# Altium PCB PCB_draft_00.PcbDoc (part 1 of 2)
Units mil, origin at the board's own origin, x right, y up, seen from the top; angles counter-clockwise.
Board outline 3461 x 3199 mil, 2 copper layers (Top Layer, Bottom Layer); 133 components, 93 nets, 389 pads, 200 vias.
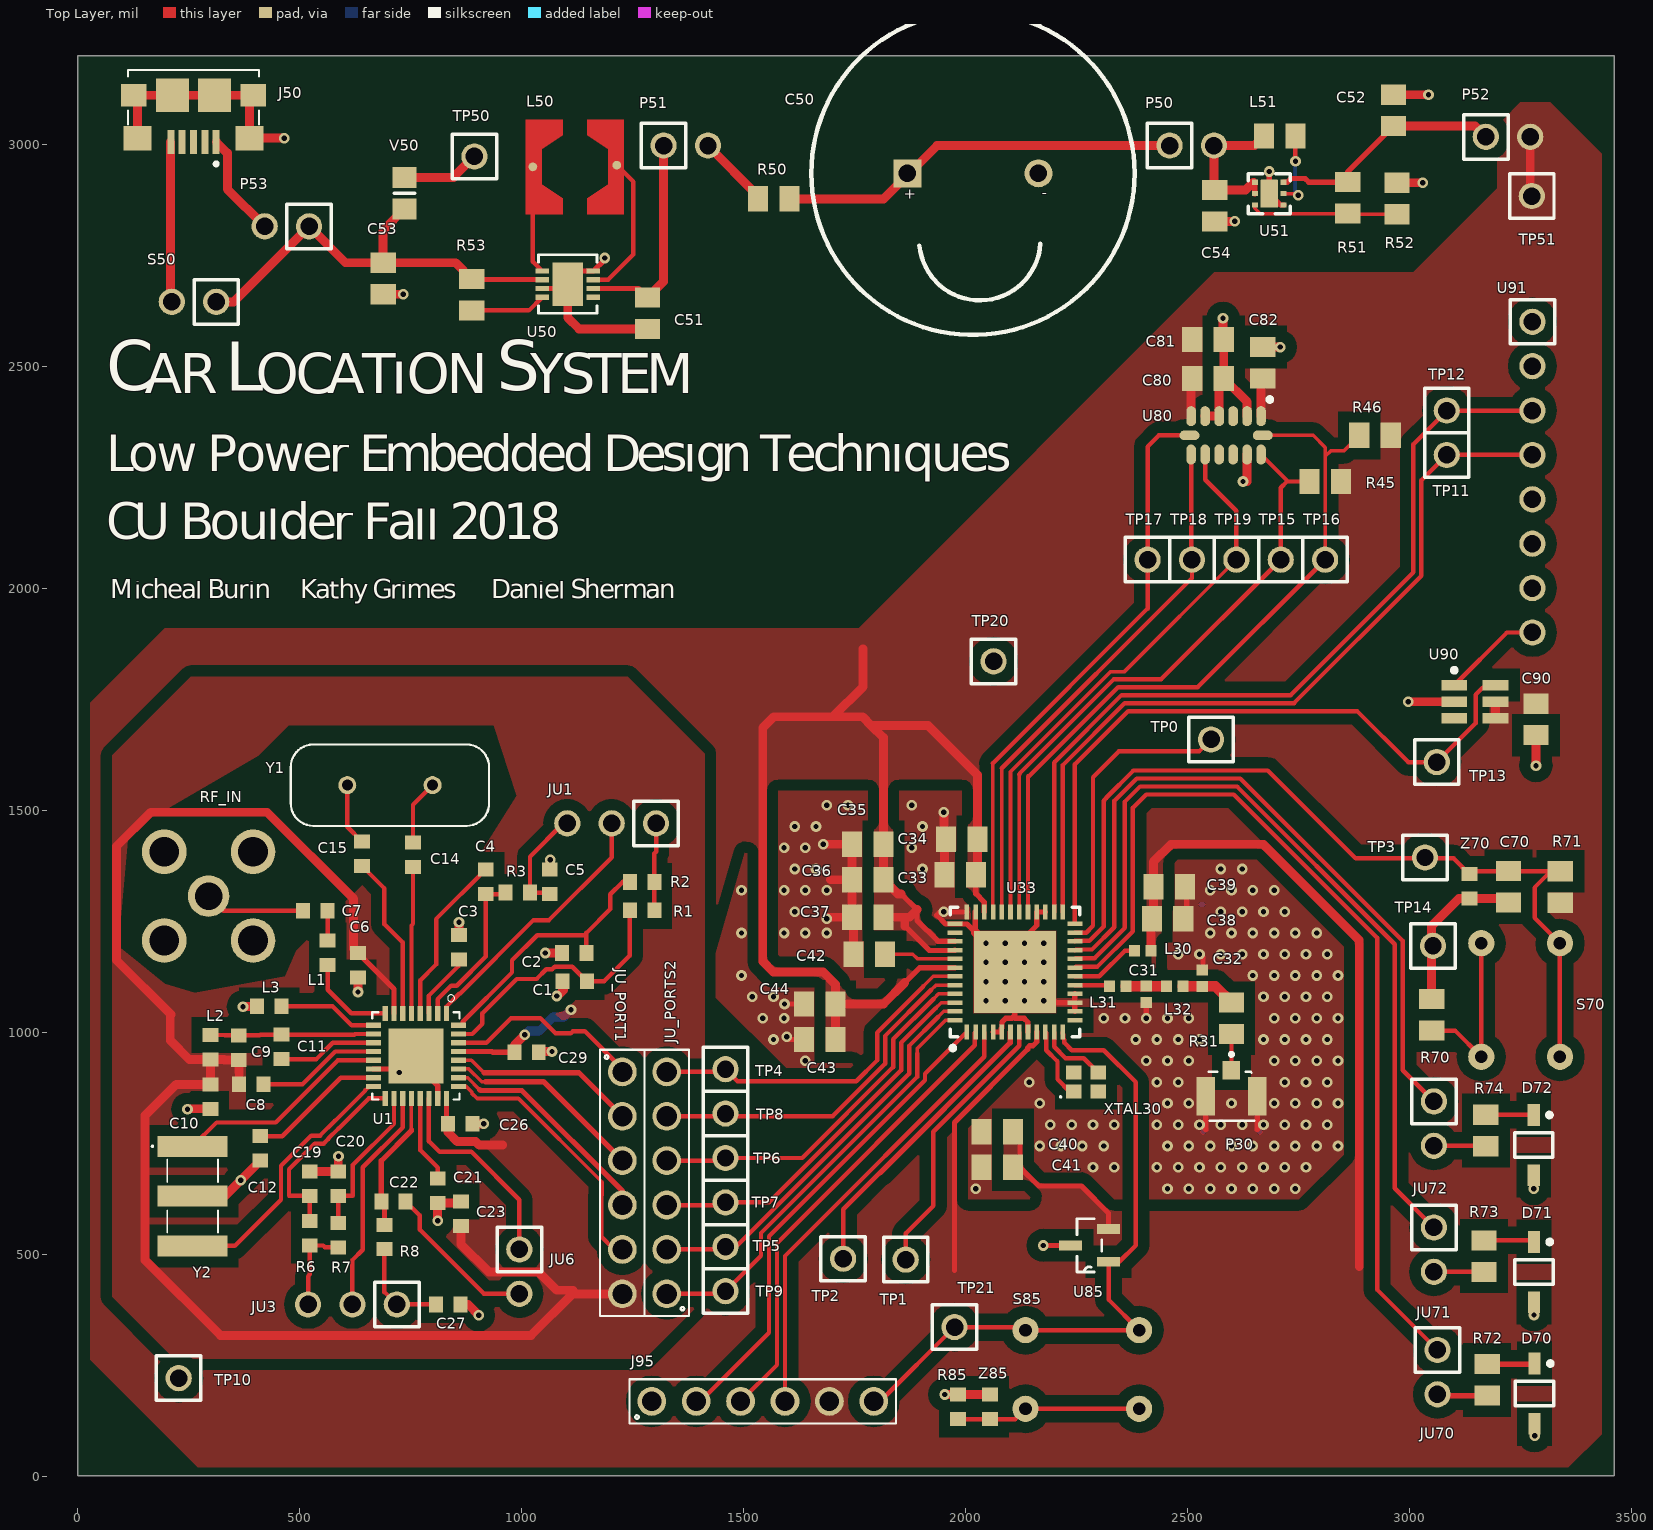
[diagram p0: Top Layer view]
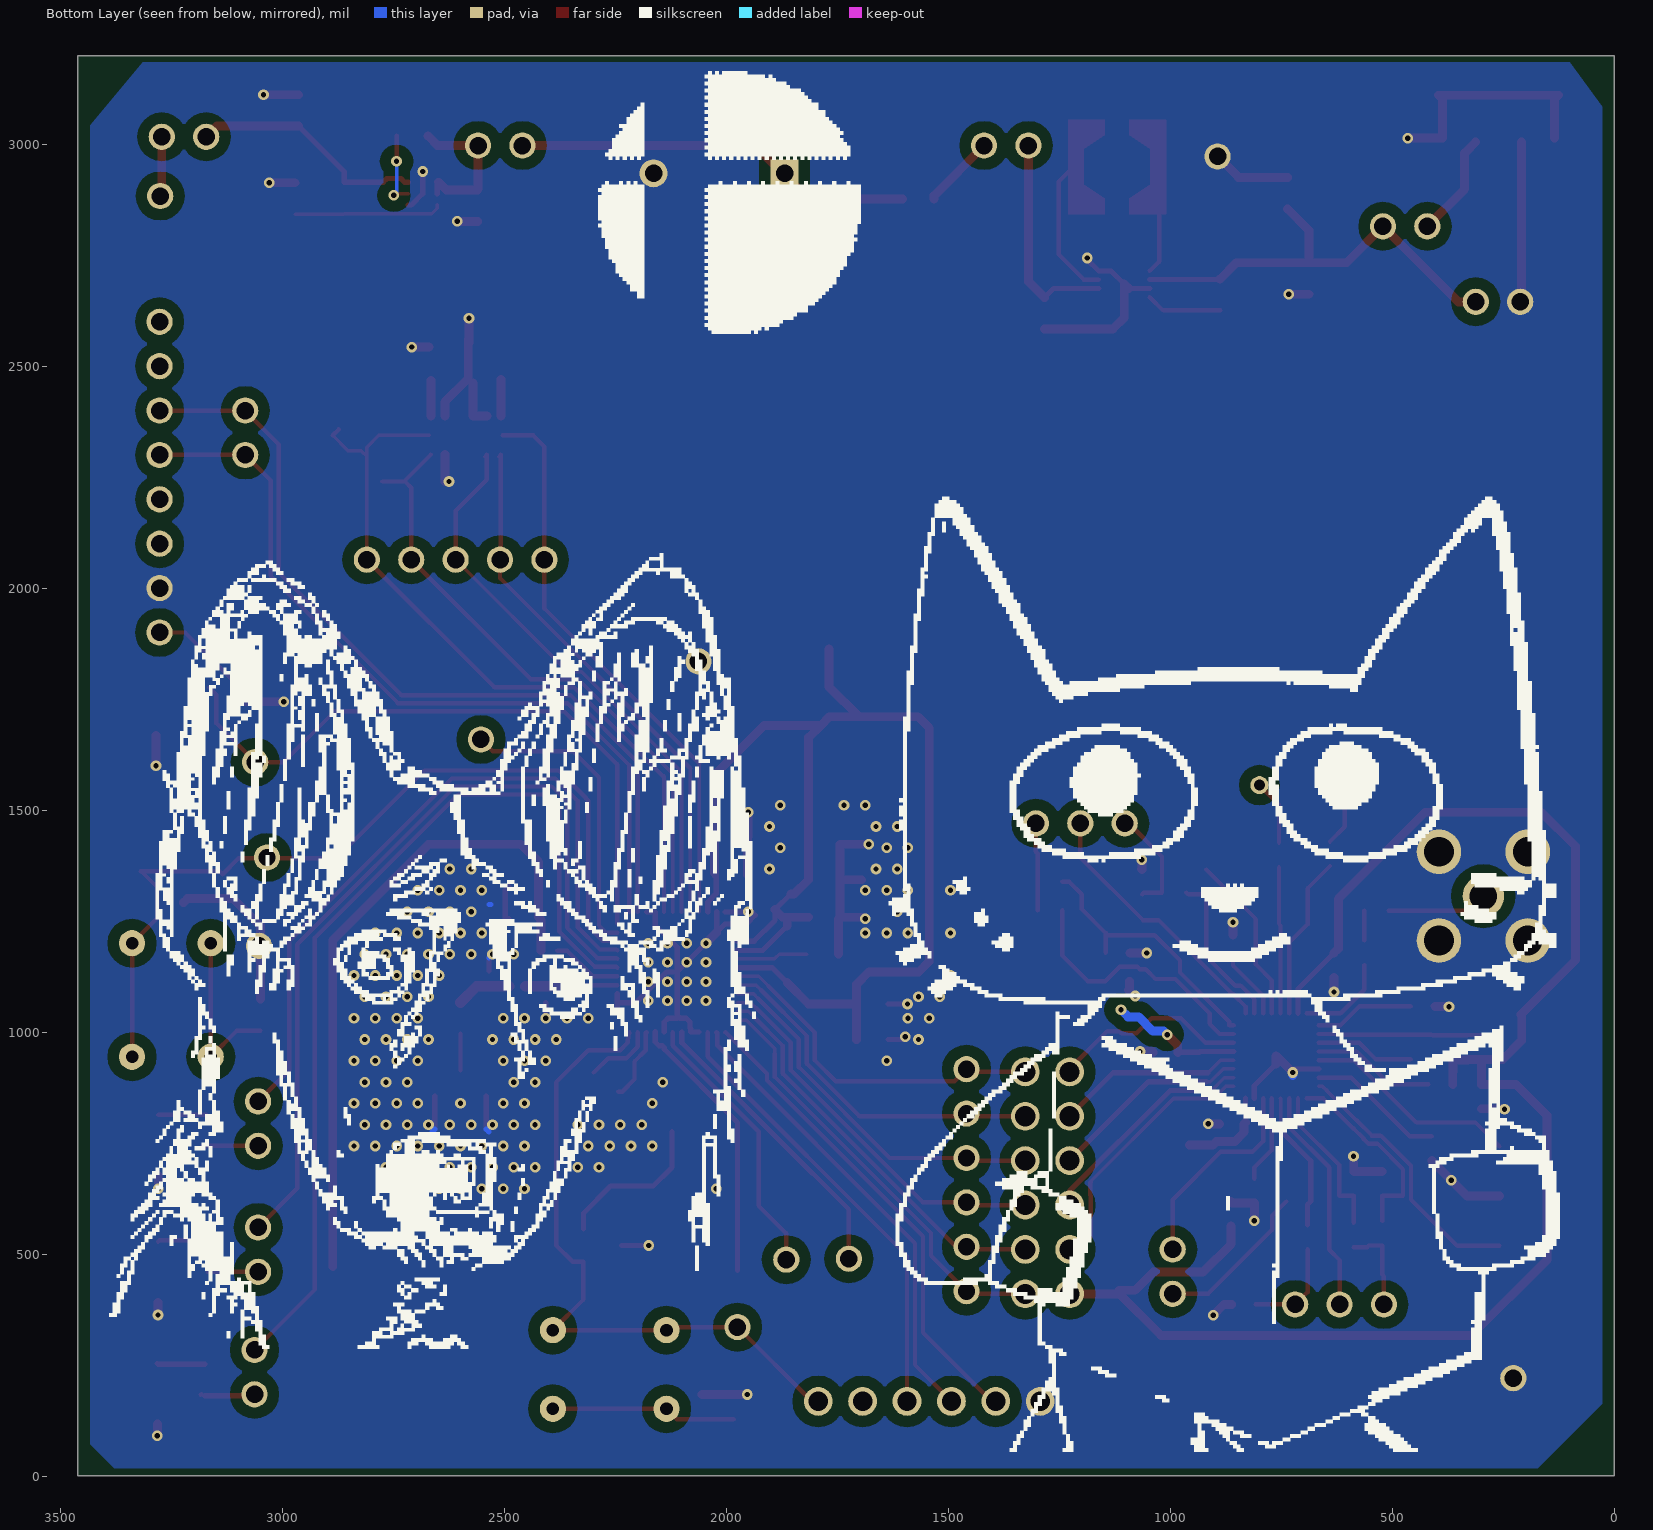
[diagram p1: Bottom Layer view, seen from below]

## Layer stack, top to bottom
Top Solder: solder mask 0.4, Solder Resist, Dk 3.5
Top Layer: signal copper 1.4
Dielectric 1: dielectric 12.6, FR-4, Dk 4.8
Bottom Layer: signal copper 1.4
Bottom Solder: solder mask 0.4, Solder Resist, Dk 3.5

## Board outline
0,1 3461,1 3461,3200 0,3200

## Design rules (kind name [scope] priority, off if disabled: settings)
Clearance [All] p1: gap=10 ignorepadtopadclearanceinfootprint=FALSE except(0: Arc-Hole Track-Hole SMDPad-Hole THPad-Hole Via-Hole Fill-Hole Poly-Hole Region-Hole Text-Hole; 6: Arc-SMDPad Track-SMDPad SMDPad-SMDPad; 8: Track-Track; 20: Arc-Via Track-Via THPad-Via Via-Via; 25: Arc-Poly Track-Poly SMDPad-Poly THPad-Poly Via-Poly Fill-Poly Poly-Poly)
Height [not InComponent('C50')] p1: minheight=0 maxheight=1000 prefheight=500
PolygonConnect [All] p1: connectstyle=Direct reliefconductorwidth=10 reliefentries=4 polygonreliefangle="90 Angle" airgapwidth=10
RoomDefinition U_GPS [InComponentClass('U_GPS')] p1: confinementstyle=ConfineIn formatcopy=TRUE lockcomponents=FALSE outline 3381.3,2689 3029,2689 3029,1601 3381.3,1601
RoomDefinition U_RFRX [InComponentClass('U_RFRX')] p2: confinementstyle=ConfineIn formatcopy=TRUE lockcomponents=FALSE outline 66,131 1386,131 1386,1747 66,1747
RoomDefinition U_Reset [InComponentClass('U_Reset')] p3: confinementstyle=ConfineIn formatcopy=TRUE lockcomponents=FALSE outline 1879,88 2431,88 2431,591 1879,591
RoomDefinition U_MCU [InComponentClass('U_MCU')] p4: confinementstyle=ConfineIn formatcopy=TRUE lockcomponents=FALSE outline 1392,456 2919,456 2919,1792 1392,1792
RoomDefinition U_IO [InComponentClass('U_IO')] p5: confinementstyle=ConfineIn formatcopy=TRUE lockcomponents=FALSE outline 2959,54.46 3394,54.46 3394,1496 2959,1496
RoomDefinition U_ESS [InComponentClass('U_ESS')] p6: confinementstyle=ConfineIn formatcopy=TRUE lockcomponents=FALSE outline 50.09,2539.32 3357.64,2539.32 3357.64,3313.51 50.09,3313.51
RoomDefinition U_Accelerometer [InComponentClass('U_Accelerometer')] p7: confinementstyle=ConfineIn formatcopy=TRUE lockcomponents=FALSE outline 2379.13,2236.5 2845.5,2236.5 2845.5,2696 2379.13,2696
RoutingLayers RoutingLayers_GND_VCC [InNet('GND')  or InNet('VCC_3.3')] p1 off: top layer_v5=FALSE bottom layer_v5=FALSE
RoutingLayers [All] p2: top layer_v5=TRUE bottom layer_v5=TRUE
RoutingVias [All] p1: holewidth=12 width=24 viastyle="Through Hole" minholewidth=12 minwidth=24 maxholewidth=14 maxwidth=28
SolderMaskExpansion [All] p1: expansion=4
Width Width_power [(InNet('VCC_3.3') OR InNet('VCC_50') OR InNet('VCC_51_1') OR InNet('VCC_51_2') OR InNet('VCC_52') OR InNet('VCC_CAP') OR InNet('VCC_USB') OR InNet('VCC_RF') OR InNet('VCC_SOLAR') OR InNet('GND'))] p1: maxlimit=20 minlimit=12 preferedwidth=20
Width [All] p2: maxlimit=12 minlimit=8 preferedwidth=10
28 further rules are at their usual default settings.

## Classes and differential pairs
component class Top: R45 R46 TP0 TP1 TP2 TP3 TP4 TP5 TP6 TP7 TP8 TP9 TP10 TP11 TP12 TP13 TP14 TP15 TP16 TP17 TP18 TP19 TP20 TP21
component class U_Accelerometer: C80 C81 C82 U80
component class U_Antenna: A30 C31 C32 L31 L32 P30 R31
component class U_ESS: C50 C51 C52 C53 C54 J50 L50 L51 P50 P51 P52 P53 R50 R51 R52 R53 S50 TP50 TP51 U50 U51 V50
component class U_GPS: C90 U90 U91
component class U_IO: C70 D70 D71 D72 JU70 JU71 JU72 R70 R71 R72 R73 R74 S70 Z70
component class U_MCU: C33 C34 C35 C36 C37 C38 C39 C40 C41 C42 C43 C44 L30 U33 XTAL30
component class U_Programmer: G95 J95
component class U_Reset: R85 S85 U85 Z85
component class U_RFRX: C1 C2 C3 C4 C5 C6 C7 C8 C9 C10 C11 C12 C14 C15 C19 C20 C21 C22 C23 C26 C27 C29 JU1 JU3 JU6 JU_PORT1 JU_PORTS2 L1 L2 L3 R1 R2 R3 R6 R7 R8 RF_IN U1 Y1 Y2

## Components (designator, comment, footprint, x,y, rotation, side; value= is the part's Value field where it differs from the comment)
C1 "Capacitor_unpolarized_0603" 0603_CHIP_FP 1119,1115 r0 top value=0.01µF
C2 "Capacitor_unpolarized_0603" 0603_CHIP_FP 1118.12,1179 r0 top value=0.01µF
C3 "Capacitor_unpolarized_0603" 0603_CHIP_FP 858.56,1191.44 r90 top value=150pF
C4 "Capacitor_unpolarized_0603" 0603_CHIP_FP 919,1339 r90 top value=330pF
C5 "Capacitor_unpolarized_0603" 0603_CHIP_FP 1063,1339 r270 top value=0.047µF
C6 "Capacitor_unpolarized_0603" 0603_CHIP_FP 631,1151.44 r270 top value=0.1µF
C7 "Capacitor_unpolarized_0603" 0603_CHIP_FP 535,1274.12 r180 top value=100pF
C8 "Capacitor_unpolarized_0603" 0603_CHIP_FP 391,883 r0 top value=100pF
C9 "Capacitor_unpolarized_0603" 0603_CHIP_FP 362.56,965.68 r90 top value=2.2pF
C10 "Capacitor_unpolarized_0603" 0603_CHIP_FP 298.56,855.44 r90 top value=220pF
C11 "Capacitor_unpolarized_0603" 0603_CHIP_FP 458.56,967.44 r270 top value=100pF
C12 "Capacitor_unpolarized_0603" 0603_CHIP_FP 410.56,738.56 r90 top value=1500pF
C14 "Capacitor_unpolarized_0603" 0603_CHIP_FP 755,1400 r90 top value=15pF
C15 "Capacitor_unpolarized_0603" 0603_CHIP_FP 640,1402.44 r90 top value=15pF
C19 "Capacitor_unpolarized_0603" 0603_CHIP_FP 522.56,659.44 r270 top value=0.01µF
C20 "Capacitor_unpolarized_0603" 0603_CHIP_FP 586.56,659.44 r270 top value=0.01µF
C21 "Capacitor_unpolarized_0603" 0603_CHIP_FP 810.56,643 r90 top value=56pF
C22 "Capacitor_unpolarized_0603" 0603_CHIP_FP 711,619 r0 top value=470pF
C23 "Capacitor_unpolarized_0603" 0603_CHIP_FP 863,591.44 r270 top value=0.01µF
C26 "Capacitor_unpolarized_0603" 0603_CHIP_FP 861,794 r180 top value=0.1µF
C27 "Capacitor_unpolarized_0603" 0603_CHIP_FP 834.56,387 r180 top value=0.047µF
C29 "Capacitor_unpolarized_0603" 0603_CHIP_FP 1010.69,955 r180 top value=0.01µF
C31 "Capacitor_unpolarized_0805" 0402_CHIP_FP 2407,1085.69 r90 top value=2.0pF
C32 "Capacitor_unpolarized_0805" 0402_CHIP_FP 2533,1122 r270 top value=1.0pF
C33 "Capacitor_unpolarized_0805" 0805_CHIP_FP 1987.57,1355.43 r180 top value=10nF
C34 "Capacitor_unpolarized_0805" 0805_CHIP_FP 1991,1435.43 r180 top value=10uF
C35 "Capacitor_unpolarized_0805" 0805_CHIP_FP 1779.57,1424 r0 top value=.1uF
C36 "Capacitor_unpolarized_0805" 0805_CHIP_FP 1779.57,1344 r0 top value=10uF
C37 "Capacitor_unpolarized_0805" 0805_CHIP_FP 1779.57,1259.43 r0 top value=.1uF
C38 "Capacitor_unpolarized_0805" 0805_CHIP_FP 2455,1256 r180 top value=10pF
C39 "Capacitor_unpolarized_0805" 0805_CHIP_FP 2458.43,1328 r180 top value=220nF
C40 "Capacitor_unpolarized_0805" 0805_CHIP_FP 2071,776 r0 top value=10pF
C41 "Capacitor_unpolarized_0805" 0805_CHIP_FP 2071,696 r0 top value=220nF
C42 "Capacitor_unpolarized_0805" 0805_CHIP_FP 1783,1176 r0 top value=1uF
C43 "Capacitor_unpolarized_0805" 0805_CHIP_FP 1671,984 r0 top value=.1uF
C44 "Capacitor_unpolarized_0805" 0805_CHIP_FP 1671,1064 r0 top value=1uF
C50 "Super Capacitor" TV1840-3R0606-R 1868.89,2935.51 r180 top value=60F
C51 "Capacitor_unpolarized_0805" 0805_CHIP_FP 1283.09,2620.18 r90 top value="10 uF"
C52 "Capacitor_unpolarized_0805" 0805_CHIP_FP 2964.09,3077.18 r270 top value="22 uF"
C53 "Capacitor_unpolarized_0805" 0805_CHIP_FP 687.57,2698.57 r90 top value="2.2 uF"
C54 "Capacitor_unpolarized_0805" 0805_CHIP_FP 2561.09,2862.74 r90 top value="10 uF"
C70 "Capacitor_unpolarized_0603" 0805_CHIP_FP 3223,1328 r90 top value=1nF
C80 "Capacitor Polarized" 0805_CHIP_FP 2546.06,2473.13 r0 top value=10uF
C81 "Capacitor_unpolarized_0805" 0805_CHIP_FP 2546.06,2561.13 r180 top value=.1uF
C82 "Capacitor_unpolarized_0805" 0805_CHIP_FP 2669.5,2508.57 r270 top value=.1uF
C90 "Capacitor_unpolarized_0603" 0805_CHIP_FP 3285,1705 r270 top value=1uF
D70 "LED Generic" LED_FP 3282,186 r270 top
D71 "LED Generic" LED_FP 3280.57,460 r270 top
D72 "LED Generic" LED_FP 3280,746 r270 top
J50 "2174507-2" J_SMD_2174507-2-5_7.8_5_2.71_2174507-2(Primary) 260.36,3111.32 r180 top
J95 "61300611121" 61300611121#1 1543,168.72 r0 top
JU1 "Header 3" HDR1X3 1302.56,1471 r180 top
JU3 "Header 3" HDR1X3 718.56,387 r180 top
JU6 "Header 2" HDR1X2 994.56,511 r270 top
JU70 "Header 2" HDR1X2 3063,284.57 r270 top
JU71 "Header 2" HDR1X2 3055,560.57 r270 top
JU72 "Header 2" HDR1X2 3055,844.57 r270 top
JU_PORT1 "61300611121" 61300611121#2 1226.56,661 r270 top
JU_PORTS2 "61300611121" 61300611121#2 1326.56,661 r90 top
L1 "Inductor" 0603_CHIP_FP 562.56,1179.44 r270 top value=100nH
L2 "Inductor" 0603_CHIP_FP 298.56,966.56 r270 top value=30nH
L3 "Inductor" 0603_CHIP_FP 431,1059 r0 top value=15nH
L30 "Inductor" 0402_CHIP_FP 2399,1184 r180 top value=22uH
L31 "Inductor" 0402_CHIP_FP 2343,1104 r0 top value=1.8nH
L32 "Inductor" 0402_CHIP_FP 2471,1104 r0 top value=3.0nH
L50 "Inductor_0805" 1919 1119.57,2950 r0 top value="15 uH"
L51 "Inductor_0805" 0805_CHIP_FP 2707.66,3019.74 r0 top value="2.2 uH"
P30 "uFL" MOLEX_1661 2599,856 r180 top
P50 "Header 2H" HDR1X2 2459.57,2998 r0 top
P51 "Header 2H" HDR1X2 1319.57,2998 r0 top
P52 "Header 2H" HDR1X2 3172.09,3017.74 r0 top
P53 "Header 2H" HDR1X2 520.79,2816.05 r180 top
R1 "Resistor" 0603_CHIP_FP 1271,1275 r0 top value=100K?
R2 "Resistor" 0603_CHIP_FP 1271,1339 r0 top value=100K?
R3 "Resistor" 0603_CHIP_FP 991,1315 r0 top value=25K?
R6 "Resistor" 0603_CHIP_FP 522.56,547.44 r90 top value=100K?
R7 "Resistor" 0603_CHIP_FP 586.56,543.44 r90 top value=100K?
R8 "Resistor" 0603_CHIP_FP 690.56,539 r90 top value=25K?
R31 "Resistor_0805" 0805_CHIP_FP 2599,1032 r90 top value=0
R45 "Resistor_0805" 0805_CHIP_FP 2810.34,2241.16 r0 top value=4.7k
R46 "Resistor_0805" 0805_CHIP_FP 2922.34,2345.16 r0 top value=4.7k
R50 "Resistor_0805" 0805_CHIP_FP 1567.57,2878 r0 top value="33 Ohm"
R51 "Resistor_0805" 0805_CHIP_FP 2860.84,2880.21 r90 top value="909 KOhms"
R52 "Resistor_0805" 0805_CHIP_FP 2971.84,2878.78 r270 top value="604 KOhms"
R53 "Resistor_0805" 0805_CHIP_FP 887.57,2662 r90 top value="1 MOhm"
R70 "Resistor_0805" 0805_CHIP_FP 3050,1039.57 r270 top value=100
R71 "Resistor_0805" 0805_CHIP_FP 3340,1327.57 r270 top value="1 MOhm"
R72 "Resistor_0805" 0805_CHIP_FP 3175,217 r270 top value=3.2kOhm
R73 "Resistor_0805" 0805_CHIP_FP 3168,496 r270 top value=3.2kOhm
R74 "Resistor_0805" 0805_CHIP_FP 3172,779 r270 top value=3.2kOhm
R85 "Resistor" 0603_CHIP_FP 1983,156.44 r270 top value=0
RF_IN "142-0701-201" 142-0701-201 294.56,1307 r0 top
S50 "Solar Cell" HDR1X2 311.57,2646 r180 top
S70 "Switch" Pushbutton 3161.84,1200.9 r270 top
S85 "Switch" Pushbutton 2390.91,329.17 r180 top
TP0 "Testpoint" HDR1X1 2553,1660 r0 top
TP1 "Testpoint" HDR1X1 1865,488 r0 top
TP2 "Testpoint" HDR1X1 1724,490 r0 top
TP3 "Testpoint" HDR1X1 3035,1394 r180 top
TP4 "Testpoint" HDR1X1 1459,917 r180 top
TP5 "Testpoint" HDR1X1 1459,517 r90 top
TP6 "Testpoint" HDR1X1 1459,717 r90 top
TP7 "Testpoint" HDR1X1 1459,617 r90 top
TP8 "Testpoint" HDR1X1 1459,817 r90 top
TP9 "Testpoint" HDR1X1 1459,417 r90 top
TP10 "Testpoint" HDR1X1 227,221 r180 top
TP11 "Testpoint" HDR1X1 3084,2301 r90 top
TP12 "Testpoint" HDR1X1 3084,2401 r90 top
TP13 "Testpoint" HDR1X1 3061.59,1609 r90 top
TP14 "Testpoint" HDR1X1 3053,1195 r180 top
TP15 "Testpoint" HDR1X1 2710,2065 r90 top
TP16 "Testpoint" HDR1X1 2810,2065 r90 top
TP17 "Testpoint" HDR1X1 2410,2065 r180 top
TP18 "Testpoint" HDR1X1 2510,2065 r180 top
TP19 "Testpoint" HDR1X1 2610,2065 r180 top
TP20 "Testpoint" HDR1X1 2063,1836 r180 top
TP21 "Testpoint" HDR1X1 1975,336 r180 top
TP50 "Testpoint" HDR1X1 893.24,2973.53 r90 top
TP51 "Testpoint" HDR1X1 3275.64,2884.31 r90 top
U1 "MAX1471" QFN50P500X500X80-33N 761.35,947.13 r270 top
U33 "EFR32BG1B232F256GM48-C0" QFN127P600-8N 2651.94,1676.94 r90 top
U50 "LTC3531EDD-3PBF" DFN-8_DD 1103.57,2686 r0 top
U51 "ADP1607ACPZN-R7" ADP1607 2684.09,2889.74 r90 top
U80 "MOTION/POSITION-ADXL345BCCZ-RL(14P-5.0X3.0MM)" ADI-CC-14-1_V 2586.92,2345.13 r270 top
U85 "DS1818" SOT95P240X110-3N 2279,520 r180 top value=3.06V
U90 "TPS22860DBVR" SOT95P279X145-6N 3147.5,1745 r0 top
U91 "GPS MAX-M8Q Breakout" HDR1X8 3277,2601 r270 top
V50 "Res Varistor" 6-0805_N 735.76,2890.85 r90 top
XTAL30 "crystal_4_legged" OSC-DFN140P160X55-4N 2271,888 r90 top
Y1 "Y1" XTAL_ECS-100-18-4X 703,1557 r0 top (schematic designator "Crystal Oscillator")
Y2 "Y2" SFECV10M7CQ0C01R0 251.67,631 r90 top (schematic designator "CeramFilter 10.7MHz 180kHz")
Z70 "Diode" 0603_CHIP_FP 3135,1329.01 r270 top
Z85 "Diode" 0603_CHIP_FP 2055,156.44 r90 top

## Footprints (in the part's own frame and the unit in brackets; to place one, negate y for a bottom-side part, rotate by r counter-clockwise, add the part's x,y. Pads: shape width x height; smd on the part's side, far side on the other; paste and mask are expansions set on the pad)
6-0805_N [mm] "Chip Resistor, Body 2.0x1.2mm, IPC Medium Density"
  rect 1.2x1.4 smd: 1(-0.9,0) 2(0.9,0)
  silkscreen extent 0,-0.6 0,0.6, body extent -1.07,-0.7 1.07,0.7, height 0.7
142-0701-201 [mm]
  round 2.55 hole 1.7: 1(-2.54,2.54) 2(2.54,2.54) 3(-2.54,-2.54) 4(2.54,-2.54)
  round 2.37 hole 1.57: 5(0,0)
0402_CHIP_FP [mm] "0402 1.00 x .05mm Medium density IPC"
  rect 0.63x0.64 smd: 1(-0.465,0) 2(0.465,0)
  body extent -0.55,-0.3 0.55,0.3, height 0.45
0603_CHIP_FP [mm] "Chip Capacitor, Body 1.6x0.8mm, IPC High Density"
  rect 0.8x0.9 smd: 1(-0.7,0) 2(0.7,0)
  body extent -0.87,-0.48 0.87,0.48, height 1.3
0805_CHIP_FP [mm] "Molded 2-Leads, Body 2.00x1.25mm, IPC Medium Density"
  rect 1.15x1.45 smd: 1(-0.9,0) 2(0.9,0)
  body extent -1.1,-0.72 1.1,0.72, height 1.45
1919 [mm]
  round 0.5 smd: 1(-2.4,0) 2(2.4,0.1)
  Top Layer region: -0.7,1.8 -0.7,2.7 -2.8,2.7 -2.8,-2.7 -0.7,-2.7 -0.7,-1.8 -1.9,-1 -1.9,1
  Top Layer region: 0.7,-1.8 0.7,-2.7 2.8,-2.7 2.8,2.7 0.7,2.7 0.7,1.8 1.9,1 1.9,-1
  body extent -2.5,-2.5 2.5,2.5, height 1.45
61300611121#1 [mm]
  round 1.65 hole 1.1: 1(-6.35,0) 2(-3.81,0) 3(-1.27,0) 4(1.27,0) 5(3.81,0) 6(6.35,0)
  silkscreen extent -7.62,-1.27 7.62,1.27
61300611121#2 [mm]
  round 1.65 hole 1.15: 1(-6.35,0) 2(-3.81,0) 3(-1.27,0) 4(1.27,0) 5(3.81,0) 6(6.35,0)
  silkscreen extent -7.62,-1.27 7.62,1.27
ADI-CC-14-1_V [mm] "QFN, 14-Leads, Body 5x3mm, Pitch 0.8mm"
  oval 1.145x0.55 smd: 1(-1.097,2) 2(-1.097,1.2) 3(-1.097,0.4) 4(-1.097,-0.4) 5(-1.097,-1.2) 6(-1.097,-2) 8(1.097,-2) 9(1.097,-1.2) 10(1.097,-0.4) 11(1.097,0.4) 12(1.097,1.2) 13(1.097,2)
  oval 0.55x1.145 smd: 7(0,-2.097) 14(0,2.098)
  silkscreen extent -2.18,2.38 -1.93,2.63, body extent -1.5,-2.5 1.5,2.5, height 1
ADP1607 [mm]
  rect 0.3x0.35 smd: 1(0.65,0.825) 2(0,0.825) 3(-0.65,0.825) 4(-0.65,-0.825) 5(0,-0.825) 6(0.65,-0.825)
  rrect10% 1.6x1 smd: 7(0,0)
  silkscreen extent -1.15,-1.2 1.15,1.21
DFN-8_DD [mil]
  rect 31x12 smd: 1(-57.5,29.53) 2(-57.5,9.84) 3(-57.5,-9.84) 4(-57.5,-29.53) 5(57.5,-29.53) 6(57.5,-9.84) 7(57.5,9.84) 8(57.5,29.53)
  rect 69x98 smd: 9(0,0)
  silkscreen extent -66,-66 66,66
HDR1X1 [mm] "Connector; Header; 1 Position"
  round 1.5 hole 1: 1(0,0)
  silkscreen extent -1.27,-1.27 1.27,1.27
HDR1X2 [mm] "Connector; Header; 2 Position"
  round 1.5 hole 1: 1(0,0) 2(2.54,0)
  silkscreen extent -1.27,-1.27 1.27,1.27
HDR1X3 [mm] "Connector; Header; 3 Position"
  round 1.5 hole 1: 1(0,0) 2(2.54,0) 3(5.08,0)
  silkscreen extent -1.27,-1.27 1.27,1.27
HDR1X8 [mm] "Connector; Header; 8 Position"
  round 1.5 hole 1: 1(0,0) 2(2.54,0) 3(5.08,0) 4(7.62,0) 5(10.16,0) 6(12.7,0) 7(15.24,0) 8(17.78,0)
  silkscreen extent -1.27,-1.27 1.27,1.27
J_SMD_2174507-2-5_7.8_5_2.71_2174507-2(Primary) [mm]
  rect 0.4x1.35 smd: 1(-1.3,2.675) 2(-0.65,2.675) 3(0,2.675) 4(0.65,2.675) 5(1.3,2.675)
  rect 1.6x1.4 smd: S1(-3.2,2.45) S6(3.2,2.45)
  rect 1.45x1.3 smd: S2(-3.425,0) S5(3.425,0)
  rect 1.9x1.9 smd: S3(-1.2,0) S4(1.2,0)
  silkscreen extent -3.75,-1.45 3.75,4.02
LED_FP [mm] "SOP, 2-Leads, Body 2.08x2.08mm, IPC Medium Density"
  rect 1.25x0.7 smd: 1(-1.725,0) 2(1.725,0)
  silkscreen extent -1.85,-1.1 0.7,1.1, body extent -1.1,-1.1 1.1,1.1, height 2.3
MOLEX_1661 [mm]
  rect 1x1.05 smd: 1(0,-1.5)
  rect 1.05x2.2 smd: 2(-1.475,0) 3(1.475,0)
  silkscreen extent -1.3,-2.5 1.3,1.4
OSC-DFN140P160X55-4N [mm] "DFN, 4-Leads, Body 2.00x1.60mm, Pitch 1.40mm, IPC Medium Density"
  rect 0.8x0.9 smd: 1(-0.55,0.7) 2(-0.55,-0.7) 3(0.55,-0.7) 4(0.55,0.7)
  silkscreen extent -0.9,1.4 -0.8,1.5, body extent -0.85,-1.05 0.85,1.05, height 0.55
Pushbutton [mm]
  round 1.5 hole 0.72: 1(0,0) 2(0,4.5) 3(6.5,0) 4(6.5,4.5)
QFN50P500X500X80-33N [mm]
  rect 0.86x0.3 smd: 1(-2.435,1.75) 2(-2.435,1.25) 3(-2.435,0.75) 4(-2.435,0.25) 5(-2.435,-0.25) 6(-2.435,-0.75) 7(-2.435,-1.25) 8(-2.435,-1.75) 17(2.435,-1.75) 18(2.435,-1.25) 19(2.435,-0.75) 20(2.435,-0.25) 21(2.435,0.25) 22(2.435,0.75) 23(2.435,1.25) 24(2.435,1.75)
  rect 0.3x0.86 smd: 9(-1.75,-2.435) 10(-1.25,-2.435) 11(-0.75,-2.435) 12(-0.25,-2.435) 13(0.25,-2.435) 14(0.75,-2.435) 15(1.25,-2.435) 16(1.75,-2.435) 25(1.75,2.435) 26(1.25,2.435) 27(0.75,2.435) 28(0.25,2.435) 29(-0.25,2.435) 30(-0.75,2.435) 31(-1.25,2.435) 32(-1.75,2.435)
  rect 3.15x3.15 smd: 33(0,0)
  silkscreen extent -3.49,-2.5 2.5,2.5
QFN127P600-8N [mm] "EFR32BG1B232F256GM48-C0-QFN48"
  rect 4.7x4.7 smd: 0(-13.74,13.74)
  rect 0.86x0.26 smd: 1(-17.175,16.49) 2(-17.175,15.99) 3(-17.175,15.49) 4(-17.175,14.99) 5(-17.175,14.49) 6(-17.175,13.99) 7(-17.175,13.49) 8(-17.175,12.99) 9(-17.175,12.49) 10(-17.175,11.99) 11(-17.175,11.49) 12(-17.175,10.99) 25(-10.305,10.99) 26(-10.305,11.49) 27(-10.305,11.99) 28(-10.305,12.49) 29(-10.305,12.99) 30(-10.305,13.49) 31(-10.305,13.99) 32(-10.305,14.49) 33(-10.305,14.99) 34(-10.305,15.49) 35(-10.305,15.99) 36(-10.305,16.49)
  rect 0.26x0.86 smd: 13(-16.49,10.305) 14(-15.99,10.305) 15(-15.49,10.305) 16(-14.99,10.305) 17(-14.49,10.305) 18(-13.99,10.305) 19(-13.49,10.305) 20(-12.99,10.305) 21(-12.49,10.305) 22(-11.99,10.305) 23(-11.49,10.305) 24(-10.99,10.305) 37(-10.99,17.175) 38(-11.49,17.175) 39(-11.99,17.175) 40(-12.49,17.175) 41(-12.99,17.175) 42(-13.49,17.175) 43(-13.99,17.175) 44(-14.49,17.175) 45(-14.99,17.175) 46(-15.49,17.175) 47(-15.99,17.175) 48(-16.49,17.175)
  silkscreen extent -18.21,10.04 -10.04,17.44, body extent -17.29,10.19 -10.19,17.29, height 0.9
SFECV10M7CQ0C01R0 [mm]
  rect 1.2x4 smd: 1(2.85,-0.175) 2(0,-0.175) 3(-2.85,-0.175)
  silkscreen extent -2.1,-1.63 2.9,2.17
SOT95P240X110-3N [mil]
  rect 52x22 smd: 1(-43,37) 2(-43,-37) 3(43,0)
  silkscreen extent -28,-60 28,60
SOT95P279X145-6N [mm] "SOT23, 6-Leads, Body 2.90x2.79mm, Pitch 0.95mm, IPC Medium Density"
  rect 1.473x0.6 smd: 1(-1.181,0.95) 2(-1.181,0) 3(-1.181,-0.95) 4(1.181,-0.95) 5(1.181,0) 6(1.181,0.95)
  silkscreen extent -1.31,1.68 -1.06,1.92, body extent -0.88,-1.5 0.87,1.5, height 1.45
TV1840-3R0606-R [mm]
  rect 1.6x1.6 hole 1: 1(0,0)
  round 1.6 hole 1: 2(-7.5,0)
  silkscreen extent -13,-9.25 5.5,9.25
XTAL_ECS-100-18-4X [mm]
  round 1.03 hole 0.63: 1(-2.44,0) 2(2.44,0)
  silkscreen extent -5.68,-2.33 5.68,2.33

## Part data
C1 C2 C19 C20 C23 C29: "CAP CER 10000PF 50V X7R 0603", Manufacturer="Murata Electronics North America", Manufacturer Part Number=GCM188R71H103KA37D, Vendor Part Number=490-4778-1-ND, ComponentLink1Description=Datasheet, ComponentLink1URL=https://www.digikey.com/product-detail/en/murata-electronics-north-america/GCM188R71H103KA37D/490-4778-1-ND/1641697, Cost=.071, Vendor=Digikey, Vendor Description="CAP CER 10000PF 50V X7R 0603"
C3: "CAP CER 150PF 100V C0G/NP0 0603", Manufacturer="Murata Electronics North America", Manufacturer Part Number=GCM1885C2A151JA16D, Vendor Part Number=490-4946-1-ND, ComponentLink1Description=Datasheet, ComponentLink1URL=https://www.digikey.com/product-detail/en/murata-electronics-north-america/GCM1885C2A151JA16D/490-4946-1-ND/1765265, Cost=.15, Vendor=Digikey, Vendor Description="CAP CER 150PF 100V C0G/NP0 0603"
C4: "CAP CER 330PF 100V C0G/NP0 0603", Manufacturer="Murata Electronics North America", Manufacturer Part Number=GCM1885C2A331JA16D, Vendor Part Number=490-4948-1-ND, ComponentLink1Description=Datasheet, ComponentLink1URL=https://www.digikey.com/products/en/capacitors/ceramic-capacitors/60?k=&pkeyword=&pv2049=u330pF&pv3=1&pv3=4&pv3=2&sf=0&FV=fffc01ea%2Cfffc0227%2Cfffc1f73%2C1c0002%2C400005%2C11401c5%2C3f0007c%2C3f00019%2C3f0001b%2C3f00028%2C3f0003f%2C1f140000%2Cffe0003c&quantity=&ColumnSort=-1000002&page=1&pageSize=25, Cost=.19, Vendor=Digikey, Vendor Description="CAP CER 330PF 100V C0G/NP0 0603"
C5 C27: "CAP CER 0.047UF 25V X7R 0603", Manufacturer="Murata Electronics North America", Manufacturer Part Number=GRM188R71E473JA01D, Vendor Part Number=490-11528-1-ND, ComponentLink1Description=Datasheet, ComponentLink1URL=https://www.digikey.com/product-detail/en/murata-electronics-north-america/GRM188R71E473JA01D/490-11528-1-ND/5333368, Cost=.112, Vendor=Digikey, Vendor Description="CAP CER 0.047UF 25V X7R 0603"
C6 C26: "CAP CER 0.1UF 100V X7R 0603", Manufacturer="Murata Electronics North America", Manufacturer Part Number=GRM188R72A104KA35D, Vendor Part Number=490-3285-1-ND, ComponentLink1Description=Datasheet, ComponentLink1URL=https://www.digikey.com/product-detail/en/murata-electronics-north-america/GRM188R72A104KA35D/490-3285-1-ND/702826, Cost=.201, Vendor=Digikey, Vendor Description="CAP CER 0.1UF 100V X7R 0603"
C7 C8 C11: "CAP CER 100PF 100V C0G/NP0 0603", Manufacturer="Murata Electronics North America", Manufacturer Part Number=GCM1885C2A101JA16D, Vendor Part Number=490-4771-1-ND, ComponentLink1Description=Datasheet, ComponentLink1URL=https://www.digikey.com/product-detail/en/murata-electronics-north-america/GCM1885C2A101JA16D/490-4771-1-ND/1641690, Cost=.097, Vendor=Digikey, Vendor Description="CAP CER 100PF 100V C0G/NP0 0603"
C9: "CAP CER 2.2PF 100V C0G/NP0 0603", Manufacturer="Murata Electronics North America", Manufacturer Part Number=GQM1885C2A2R2BB01D, Vendor Part Number=490-4838-1-ND, ComponentLink1Description=Datasheet, ComponentLink1URL=https://www.digikey.com/product-detail/en/murata-electronics-north-america/GQM1885C2A2R2BB01D/490-4838-1-ND/1687484, Cost=.74, Vendor=Digikey, Vendor Description="CAP CER 2.2PF 100V C0G/NP0 0603"
C10: "CAP CER 220PF 100V X7R 0603", Manufacturer="Murata Electronics North America", Manufacturer Part Number=GRM188R72A221KA01D, Vendor Part Number=490-1460-1-ND, ComponentLink1Description=Datasheet, ComponentLink1URL=https://www.digikey.com/product-detail/en/murata-electronics-north-america/GRM188R72A221KA01D/490-1460-1-ND/587749, Cost=.092, Vendor=Digikey, Vendor Description="CAP CER 220PF 100V X7R 0603"
C12: "CAP CER 1500PF 100V X7R 0603", Manufacturer="Murata Electronics North America", Manufacturer Part Number=GRM188R72A152KA01D, Vendor Part Number=490-1475-1-ND, ComponentLink1Description=Datasheet, ComponentLink1URL=https://www.digikey.com/product-detail/en/murata-electronics-north-america/GRM188R72A152KA01D/490-1475-1-ND/587850, Cost=.13, Vendor=Digikey, Vendor Description="CAP CER 1500PF 100V X7R 0603"
C14 C15: "CAP CER 15PF 50V C0G/NP0 0603", Manufacturer="Murata Electronics North America", Manufacturer Part Number=GQM1885C1H150JB01D, Vendor Part Number=490-3572-1-ND, ComponentLink1Description=Datasheet, ComponentLink1URL=https://www.digikey.com/product-detail/en/murata-electronics-north-america/GQM1885C1H150JB01D/490-3572-1-ND/789572, Cost=.581, Vendor=Digikey, Vendor Description="CAP CER 15PF 50V C0G/NP0 0603"
C21: "CAP CER 56PF 100V C0G/NP0 0603", Manufacturer="Murata Electronics North America", Manufacturer Part Number=GCM1885C2A560JA16D, Vendor Part Number=490-17769-1-ND, ComponentLink1Description=Datasheet, ComponentLink1URL=https://www.digikey.com/product-detail/en/murata-electronics-north-america/GCM1885C2A560JA16D/490-17769-1-ND/8540005, Cost=.12, Vendor=Digikey, Vendor Description="CAP CER 56PF 100V C0G/NP0 0603"
C22: "CAP CER 470PF 100V C0G/NP0 0603", Manufacturer="Murata Electronics North America", Manufacturer Part Number=GCM1885C2A471JA16D, Vendor Part Number=490-4949-1-ND, ComponentLink1Description=Datasheet, ComponentLink1URL=https://www.digikey.com/products/en/capacitors/ceramic-capacitors/60?k=&pkeyword=&pv2049=u470pF&pv3=1&pv3=4&pv3=2&sf=0&FV=fffc01ea%2Cfffc0227%2Cfffc1f73%2C1c0002%2C400005%2C11401c5%2C3f0007c%2C3f00019%2C3f0001b%2C3f00028%2C3f0003f%2C1f140000%2Cffe0003c&quantity=&ColumnSort=-1000002&page=1&pageSize=25, Cost=.166, Vendor=Digikey, Vendor Description="CAP CER 470PF 100V C0G/NP0 0603"
C31: Manufacturer="Murata Electronics North America", Manufacturer Part Number=GJM1555C1H2R0WB01D, Vendor Part Number=490-11205-1-ND, ComponentLink1Description=Datasheet, ComponentLink1URL=https://www.digikey.com/product-detail/en/murata-electronics-north-america/GJM1555C1H2R0WB01D/490-11205-1-ND/5333045, Cost=.30, Vendor=Digikey, Vendor Description="CAP CER 2PF 50V C0G/NP0 0402"
C32: Manufacturer="Murata Electronics North America", Manufacturer Part Number=GJM1555C1H1R0WB01D, Vendor Part Number=490-11193-1-ND, ComponentLink1Description=Datasheet, ComponentLink1URL=https://www.digikey.com/product-detail/en/murata-electronics-north-america/GJM1555C1H1R0WB01D/490-11193-1-ND/5333033, Cost=.30, Vendor=Digikey, Vendor Description="CAP CER 1PF 50V C0G/NP0 0402"
C33: Manufacturer="Samsung Electro-Mechanics", Manufacturer Part Number=CL21B103KAANNNC, Vendor Part Number=1276-2434-1-ND, ComponentLink1Description=Datasheet, ComponentLink1URL=https://www.digikey.com/product-detail/en/samsung-electro-mechanics/CL21B103KAANNNC/1276-2434-1-ND/3890520, Cost=.10, Vendor=Digikey, Vendor Description="CAP CER 10000PF 25V X7R 0805"
C34 C36: Manufacturer="Samsung Electro-Mechanics", Manufacturer Part Number=CL21A106KPFNNNG, Vendor Part Number=1276-6456-1-ND, ComponentLink1Description=Datasheet, ComponentLink1URL=https://www.digikey.com/product-detail/en/samsung-electro-mechanics/CL21A106KPFNNNG/1276-6456-1-ND/5958084, Cost=.10, Vendor=Digikey, Vendor Description="CAP CER 10UF 10V X5R 0805"
C35 C37 C43 C81 C82: Manufacturer="Johanson Dielectrics Inc.", Manufacturer Part Number=250R15W104KV4T, Vendor Part Number=709-1185-1-ND, ComponentLink1Description=Datasheet, ComponentLink1URL=https://www.digikey.com/product-detail/en/johanson-dielectrics-inc/250R15W104KV4T/709-1185-1-ND/1859517, Cost=.18, Vendor=Digikey, Vendor Description="CAP CER 0.1UF 25V X7R 0805"
C38 C40: Manufacturer="Wurth Electronics Inc.", Manufacturer Part Number=885012007028, Vendor Part Number=732-7827-1-ND, ComponentLink1Description=Datasheet, ComponentLink1URL=https://www.digikey.com/product-detail/en/wurth-electronics-inc/885012007028/732-7827-1-ND/5454454, Cost=.04, Vendor=Digikey, Vendor Description="CAP CER 10PF 25V C0G/NP0 0805"
C39 C41: Manufacturer="Wurth Electronics Inc.", Manufacturer Part Number=885012207074, Vendor Part Number=732-7668-1-ND, ComponentLink1Description=Datasheet, ComponentLink1URL=https://www.digikey.com/product-detail/en/wurth-electronics-inc/885012207074/732-7668-1-ND/5454295, Cost=.11, Vendor=Digikey, Vendor Description="CAP CER 0.22UF 25V X7R 0805"
C42 C44 C90: Manufacturer="Samsung Electro-Mechanics", Manufacturer Part Number=CL21A105KOFNNNE, Vendor Part Number=1276-2888-1-ND, ComponentLink1Description=Datasheet, ComponentLink1URL=https://www.digikey.com/product-detail/en/samsung-electro-mechanics/CL21A105KOFNNNE/1276-2888-1-ND/3890974, Cost=.10, Vendor=Digikey, Vendor Description="CAP CER 1UF 16V X5R 0805"
C50: library part "Capacitor Polarized", Manufacturer=Eaton, Manufacturer Part Number=TV1840-3R0606-R, ComponentLink1Description=Datasheet, ComponentLink1URL=https://www.digikey.com/products/en?keywords=TV1840-3R0606-R, Cost=19.46, Vendor=Digikey, Vendor Description="CAP, 3.0V, 60F", Vendor Part Number=TV1840-3R0606-R
C51 C54: Manufacturer="Samsung Electro-Mechanics", Manufacturer Part Number=CL21A106KQCLRNC, Vendor Part Number=1276-2405-1-ND, ComponentLink1Description=Datasheet, ComponentLink1URL=https://www.digikey.com/products/en?keywords=1276-2405-1-ND, Vendor=Digikey, Vendor Description="CAP CER 10UF 6.3V X5R 0805"
  C51: Cost=.08
  C54: Cost=.11
C52: Manufacturer="Samsung Electro-Mechanics", Manufacturer Part Number=CL21A226MQQNNNE, Vendor Part Number=1276-1100-1-ND, ComponentLink1Description=Datasheet, ComponentLink1URL=http://www.samsungsem.com/kr/support/product-search/mlcc/__icsFiles/afieldfile/2018/06/20/CL21A226MQQNNNE.pdf, Cost=0.22, Vendor=Digikey, Vendor Description="CAP CER 22UF 6.3V X5R 0805"
C53: Manufacturer="Wurth Electronics Inc.", Manufacturer Part Number=885012107001, Vendor Part Number=732-7612-1-ND, ComponentLink1Description=Datasheet, ComponentLink1URL=https://www.digikey.com/products/en?keywords=732-7612-1-ND, Cost=.14, Vendor=Digikey, Vendor Description="CAP CER 2.2UF 6.3V X5R 0805"
C70: Manufacturer="Johanson Dielectrics Inc.", Manufacturer Part Number=500R15N102JV4T, Vendor Part Number=709-1180-1-ND, ComponentLink1Description=Datasheet, ComponentLink1URL=https://www.digikey.com/product-detail/en/johanson-dielectrics-inc/500R15N102JV4T/709-1180-1-ND/1859512, Cost=.30, Vendor=Digikey, Vendor Description="CAP CER 1000PF 50V C0G/NP0 0805"
C80: Manufacturer="AVX Corporation", Manufacturer Part Number=TLJR106M010R3000, Vendor Part Number=478-3346-1-ND, ComponentLink1Description=Datasheet, ComponentLink1URL=https://www.digikey.com/product-detail/en/avx-corporation/TLJR106M010R3000/478-3346-1-ND/930138, Cost=.57, Vendor=Digikey, Vendor Description="CAP TANT 10UF 10V 20% 0805"
D70: library part LED_generic, Manufacturer="Broadcom Limited", Manufacturer Part Number=HLMP-P156-HK011, Vendor Part Number=516-4089-1-ND, ComponentLink1Description=Datasheet, ComponentLink1URL=https://www.digikey.com/product-detail/en/broadcom-limited/HLMP-P156-HK011/516-4089-1-ND/9178267, Cost=.676, Vendor=Digikey, Vendor Description="LED RED CLEAR FLAT 2SMD GW"
D71 D72: library part LED_generic, "LED RED CLEAR FLAT 2SMD GW", Manufacturer="Broadcom Limited", Manufacturer Part Number=HLMP-P156-HK011, Vendor Part Number=516-4089-1-ND, ComponentLink1Description=Datasheet, ComponentLink1URL=https://www.digikey.com/product-detail/en/broadcom-limited/HLMP-P156-HK011/516-4089-1-ND/9178267, Cost=.676, Vendor=Digikey, Vendor Description="LED RED CLEAR FLAT 2SMD GW"
J50: Manufacturer="TE Connectivity AMP Connectors", Vendor Part Number=A118106CT-ND, ComponentLink1Description=Datasheet, ComponentLink1URL=https://www.digikey.com/product-detail/en/te-connectivity-amp-connectors/2174507-2/A118106CT-ND/4729913, Cost=2.88, Manufacturer Part Number=2174507-2, Vendor=Digikey, Vendor Description="REC TYPE-B ASSY MICRO USB I/O"
J95: "Board-To-Board Connector, Vertical, WR-PHD Series, Through Hole, Header, 6, 2.54 mm", Manufacturer="CONN HEADER 6 POS 2.54", Vendor Part Number=732-5319-ND, ComponentLink1Description=Datasheet, ComponentLink1URL=https://www.digikey.com/products/en?keywords=732-5319-ND, Cost=.33, Manufacturer Part Number=61300611121, Vendor=Digikey, Vendor Description="CONN HEADER 6 POS 2.54 x2"
JU1 JU3 JU6 JU70 JU71 JU72: "CONN HEADER .100 SINGL STR 36POS", Vendor Part Number=PRT-00116, ComponentLink1Description=Datasheet, ComponentLink1URL=https://www.digikey.com/product-detail/en/sullins-connector-solutions/PEC36SAAN/S1012E-36-ND/859153, Cost=bulk, Vendor=Digikey
  JU1 JU3: Vendor Description=".100 mil pitch male header x3"
  JU6 JU70 JU71 JU72: Vendor Description=".100 mil pitch male header x2"
JU_PORT1 JU_PORTS2: "Board-To-Board Connector, Vertical, WR-PHD Series, Through Hole, Header, 6, 2.54 mm", Manufacturer="CONN HEADER 6 POS 2.54", Package=None, Vendor Part Number=732-5319-ND, Availability=Unavailable, ComponentLink1Description=Datasheet, ComponentLink1URL=https://www.digikey.com/products/en?keywords=732-5319-ND, Cost=.33, Manufacturer Part Number=61300611121, MF="Wurth Electronics", MP=61300611121, Price=None, SnapEDA_Link=https://www.snapeda.com/parts/61300611121/Wurth%20Electronics%20Inc./view-part/?ref=snap, Vendor=Digikey, Vendor Description="CONN HEADER 6 POS 2.54 x2"
L1: "FIXED IND 100NH 220MA 680 MOHM", Manufacturer="Murata Electronics North America", Manufacturer Part Number=LQW18ANR10J00D, Vendor Part Number=490-1179-1-ND, ComponentLink1Description=Datasheet, ComponentLink1URL=https://www.digikey.com/product-detail/en/murata-electronics-north-america/LQW18ANR10J00D/490-1179-1-ND/584624, Cost=.17, Vendor=Digikey, Vendor Description="FIXED IND 100NH 220MA 680 MOHM"
L2: "FIXED IND 30NH 420MA 230 MOHM", Manufacturer="Murata Electronics North America", Manufacturer Part Number=LQW18AN30NJ00D, Vendor Part Number=490-6883-1-ND, ComponentLink1Description=Datasheet, ComponentLink1URL=https://www.digikey.ca/product-detail/en/murata-electronics-north-america/LQW18AN30NJ00D/490-6883-1-ND/3846080, Cost=.25, Vendor=Digikey, Vendor Description="FIXED IND 30NH 420MA 230 MOHM"
L3: "FIXED IND 15NH 600MA 130 MOHM", Manufacturer="Murata Electronics North America", Manufacturer Part Number=LQW18AN15NG00D, Vendor Part Number=490-6866-1-ND, ComponentLink1Description=Datasheet, ComponentLink1URL=https://www.digikey.com/product-detail/en/murata-electronics-north-america/LQW18AN15NG00D/490-6866-1-ND/3846063, Cost=.19, Vendor=Digikey, Vendor Description="FIXED IND 15NH 600MA 130 MOHM"
L30: Manufacturer="Murata Electronics North America", Manufacturer Part Number=LQG15HS22NJ02D, Vendor Part Number=490-2627-1-ND, ComponentLink1Description=Datasheet, ComponentLink1URL=https://www.digikey.com/product-detail/en/murata-electronics-north-america/LQG15HS22NJ02D/490-2627-1-ND/662907, Cost=.10, Vendor=Digikey, Vendor Description="FIXED IND 22NH 350MA 420 MOHM"
L31: Manufacturer="Murata Electronics North America", Manufacturer Part Number=LQP15MN1N8B02D, Vendor Part Number=490-1127-1-ND, ComponentLink1Description=Datasheet, ComponentLink1URL=https://www.digikey.com/product-detail/en/murata-electronics-north-america/LQP15MN1N8B02D/490-1127-1-ND/584573, Cost=.19, Vendor=Digikey, Vendor Description="FIXED IND 1.8NH 280MA 200 MOHM"
L32: Manufacturer="Murata Electronics North America", Manufacturer Part Number=LQP15MN3N0B02D, Vendor Part Number=490-6755-1-ND, ComponentLink1Description=Datasheet, ComponentLink1URL=https://www.digikey.com/product-detail/en/murata-electronics-north-america/LQP15MN3N0B02D/490-6755-1-ND/3845952, Cost=.19, Vendor=Digikey, Vendor Description="FIXED IND 3NH 190MA 400 MOHM SMD"
L50: Manufacturer="Wurth Electronics Inc.", Manufacturer Part Number=744042150, Vendor Part Number=732-3655-1-ND, ComponentLink1Description=Datasheet, ComponentLink1URL=https://katalog.we-online.de/pbs/datasheet/744042150.pdf, Cost=1.43, Vendor=Digikey, Vendor Description="FIXED IND 15UH 1.03A 220 MOHM"
L51: Manufacturer="Taiyo Yuden", Manufacturer Part Number=BRC2012T2R2MD, Vendor Part Number=587-2905-1-ND, ComponentLink1Description=Datasheet, ComponentLink1URL=https://www.digikey.com/products/en?keywords=587-2905-1-ND, Cost=.35, Vendor=Digikey, Vendor Description="FIXED IND 2.2UH 1A 143 MOHM SMD"
P30: library part 1661, "uFL SMT Antenna Connector", Manufacturer="Hirose Electric Co Ltd", Manufacturer Part Number=U.FL-R-SMT-1(10), Package=None, Vendor Part Number=H11891CT-ND, Availability=Unavailable, ComponentLink1Description=Datasheet, ComponentLink1URL=https://www.digikey.com/products/en/connectors-interconnects/coaxial-connectors-rf/437?k=U.FL-R-SMT-1%2810%29&k=&pkeyword=U.FL-R-SMT-1%2810%29&pv7=2&sf=0&FV=ffe001b5&quantity=&ColumnSort=0&page=1&stock=1&datasheet=1&cad=1&rohs=1&pageSize=25, Cost=1.31, MF="Keystone Electronics", MP=1661, Price=None, SnapEDA_Link=https://www.snapeda.com/parts/1661/Keystone%20Electronics/view-part/?ref=snap, Vendor=Digikey, Vendor Description="CONN U.FL RCPT STR 50 OHM SMD"
P50 P51 P52 P53: Vendor Part Number=PRT-00116, ComponentLink1Description=Datasheet, ComponentLink1URL=https://www.sparkfun.com/products/116, Cost=bulk, Vendor=Sparkfun, Vendor Description=".100 mil pitch male header x2"
R1 R2 R6 R7: library part Resistor_0603, "RES SMD 100K OHM 1% 1/4W 0603", Manufacturer="Rohm Semiconductor", Manufacturer Part Number=ESR03EZPF1003, Vendor Part Number=RHM100KADCT-ND, ComponentLink1Description=Datasheet, ComponentLink1URL=https://www.digikey.com/product-detail/en/rohm-semiconductor/ESR03EZPF1003/RHM100KADCT-ND/1983754, Cost=.126, Vendor=Digikey, Vendor Description="RES SMD 100K OHM 1% 1/4W 0603"
R3 R8: library part Resistor_0603, "Thin Film Resistors 150mW 25Kohms .1% 25ppm", Manufacturer="Vishay / Thin Film", Manufacturer Part Number=PNM0603E2502BST1, Vendor Part Number=71-PNM0603E2502BST1, ComponentLink1Description=Datasheet, ComponentLink1URL=https://www.mouser.com/ProductDetail/Vishay-Thin-Film/PNM0603E2502BST1?qs=sGAEpiMZZMvdGkrng054t3MM9KQf0jCWaRJtMFekKwY%3d, Cost=1.75, Vendor=Mouser, Vendor Description="Thin Film Resistors - SMD 150mW 25Kohms .1% 25ppm"
R31: Manufacturer="Vishay Dale", Manufacturer Part Number=CRCW08050000Z0EA, Vendor Part Number=541-0.0ACT-ND, ComponentLink1Description=Datasheet, ComponentLink1URL=https://www.digikey.com/product-detail/en/vishay-dale/CRCW08050000Z0EA/541-0.0ACT-ND/1180267, Cost=.04, Vendor=Digikey, Vendor Description="RES SMD 0 OHM JUMPER 1/8W 0805"
R45 R46: "Resistor 0805", Manufacturer=Yageo, Manufacturer Part Number=RC0805JR-074K7L, Vendor Part Number=311-4.7KARCT-ND, ComponentLink1Description=Datasheet, ComponentLink1URL=https://www.digikey.com/product-detail/en/yageo/RC0805JR-074K7L/311-4.7KARCT-ND/731274, Cost=.04, Vendor=Digikey, Vendor Description="RES SMD 4.7K OHM 5% 1/8W 0805"
R50: Manufacturer="Panasonic Electronic Components", Manufacturer Part Number=ERJ-P06J330V, Vendor Part Number=P33ADCT-ND, ComponentLink1Description=Datasheet, ComponentLink1URL=https://www.digikey.com/products/en?keywords=P33ADCT-ND, Cost=.12, Vendor=Digikey, Vendor Description="RES SMD 33 OHM 5% 1/2W 0805"
R51: Manufacturer=Yageo, Manufacturer Part Number=RC0805FR-07909KL, Vendor Part Number=311-909KCRCT-ND, ComponentLink1Description=Datasheet, ComponentLink1URL=https://www.digikey.com/products/en?keywords=311-909KCRCT-ND, Cost=.10, Vendor=Digikey, Vendor Description="RES SMD 909K OHM 1% 1/8W 0805"
R52: Manufacturer=Yageo, Manufacturer Part Number=RC0805FR-07604KL, Vendor Part Number=311-604KCRCT-ND, ComponentLink1Description=Datasheet, ComponentLink1URL=https://www.digikey.com/products/en?keywords=311-604KCRCT-ND, Cost=.10, Vendor=Digikey, Vendor Description="RES SMD 604K OHM 1% 1/8W 0805"
R53 R71: Manufacturer=Yageo, Manufacturer Part Number=RC0805FR-071ML, Vendor Part Number=311-1.00MCRCT-ND, ComponentLink1Description=Datasheet, ComponentLink1URL=https://www.digikey.com/products/en?keywords=311-1.00MCRCT-ND, Cost=.05, Vendor=Digikey, Vendor Description="RES SMD 1M OHM 1% 1/8W 0805"
R70: Manufacturer=Yageo, Manufacturer Part Number=RC0805FR-07100RL, Vendor Part Number=311-100CRCT-ND, ComponentLink1Description=Datasheet, ComponentLink1URL=https://www.digikey.com/product-detail/en/yageo/RC0805FR-07100RL/311-100CRCT-ND/730490, Cost=.10, Vendor=Digikey, Vendor Description="RES SMD 100 OHM 1% 1/8W 0805"
R72 R73 R74: Manufacturer=Yageo, Manufacturer Part Number=RC0805FR-073K24L, Vendor Part Number=311-3.24KCRCT-ND, ComponentLink1Description=Datasheet, ComponentLink1URL=https://www.digikey.com/product-detail/en/yageo/RC0805FR-073K24L/311-3.24KCRCT-ND/730758, Cost=.05, Vendor=Digikey, Vendor Description="RES SMD 3.24K OHM 1% 1/8W 0805"
R85: library part Resistor_0603, Manufacturer="Vishay Dale", Manufacturer Part Number=CRCW08050000Z0EA, Vendor Part Number=541-0.0ACT-ND, ComponentLink1Description=Datasheet, ComponentLink1URL=https://www.digikey.com/product-detail/en/vishay-dale/CRCW08050000Z0EA/541-0.0ACT-ND/1180267, Cost=.04, Vendor=Digikey, Vendor Description="RES SMD 0 OHM JUMPER 1/8W 0805"
RF_IN: "CONN SMA JACK STR 50 OHM PCB", Manufacturer="Cinch Connectivity Solutions Johnson", Vendor Part Number=J500-ND, ComponentLink1Description=Datasheet, ComponentLink1URL=https://www.digikey.com/product-detail/en/cinch-connectivity-solutions-johnson/142-0701-201/J500-ND/35274, Cost=2.79, Manufacturer Part Number=142-0701-201, Vendor=Digikey, Vendor Description="CONN SMA JACK STR 50 OHM PCB"
S50: "IXOLAR SLMD121H08L", Manufacturer=IXYS, Manufacturer Part Number=SLMD121H08L, Vendor Part Number=SLMD121H08L-ND, ComponentLink1Description=Datasheet, ComponentLink1URL=https://www.digikey.com/product-detail/en/ixys/SLMD121H08L/SLMD121H08L-ND/3463125, Cost=10.23, Vendor=Digikey, Vendor Description="MONO SOLAR CELL 86MM X 14MM"
S70 S85: library part Pushbutton, "Pushbutton Switch", Manufacturer="APEM Inc.", Manufacturer Part Number=MJTP1230, Vendor Part Number=679-2428-ND, ComponentLink1Description=Datasheet, ComponentLink1URL=https://www.digikey.com/product-detail/en/apem-inc/MJTP1230/679-2428-ND/1798037, Cost=.11, Vendor=Digikey, Vendor Description="SWITCH TACTILE SPST-NO 0.05A 12V"
TP0 TP1 TP2 TP3 TP4 TP5 TP6 TP7 TP8 TP9 TP10 TP11 TP12 TP13 TP14 TP15 TP16 TP17 TP18 TP19 TP20 TP21 TP50 TP51: Manufacturer=Sparkfun, Manufacturer Part Number=PRT-00116, ComponentLink1Description=Datasheet, ComponentLink1URL=https://www.sparkfun.com/products/116, Cost=bulk, Vendor=Sparkfun, Vendor Description="Break Away Headers - Straight", Vendor Part Number=PRT-00116
U1: library part Component_1, "RF Receiver 315MHz/434MHz Superheterodyne Rcvr", Manufacturer="Maxim Integrated", Manufacturer Part Number=MAX1471ATJ+, Vendor Part Number=700-MAX1471ATJ, ComponentLink1Description=Datasheet, ComponentLink1URL=https://www.mouser.com/ProductDetail/Maxim-Integrated/MAX1471ATJ%2b?qs=sGAEpiMZZMvxLC1VZo1hVoB57gDFwOQL7RpsI8wlcxI%3d, Cost=6.54, Vendor=Mouser, Vendor Description="RF Receiver 315MHz/434MHz Superheterodyne Rcvr"
U33: "EFR32BG1B232F256GM48-C0 48 pin", Manufacturer="Silicon Labs", Package=QFN-48, Vendor Part Number=634-EFR32BG232FGM48C, Availability=Unavailable, ComponentLink1Description=Datasheet, ComponentLink1URL=https://www.mouser.com/ProductDetail/Silicon-Labs/EFR32BG1B232F256GM48-C0?qs=sGAEpiMZZMuReUCzg6bfTBcjVff43OycMWdVD1zh22U6vZAa%252bEuL6w%3d%3d, Cost=4.82, Manufacturer Part Number=EFR32BG1B232F256GM48-C0, MF="Silicon Labs", MP=EFR32BG1B232F256GM48-C0, Price=None, Vendor=Mouser, Vendor Description="RF System on a Chip - SoC Blue Gecko SoC, 2.4 GHz, 256 kB Flash, 32 kB RAM, +10.5 dBm, QFN48, BLE"
U50: "LTC3531 - 200mA Buck-Boost Synchronous DC/DC Converters", Manufacturer="Linear Technology", Manufacturer Part Number=LTC3531EDD-3#PBF, Vender Part Number=LTC3531EDD-3#PBF-ND, ComponentLink1Description=Datasheet, ComponentLink1URL=https://www.analog.com/media/en/technical-documentation/data-sheets/3531fb.pdf, Cost=4.00, SnapEDA_Link=https://www.snapeda.com/parts/LTC3531EDD-3%23PBF/Linear%20Technology/view-part/?ref=snap, Vender=Digikey, Vender Description="IC REG BUCK BST 3.02V 0.2A 8DFN"
U51: Manufacturer="Analog Devices Inc.", Vendor Part Number=ADP1607ACPZN-R7CT-ND, ComponentLink1Description=Datasheet, ComponentLink1URL=https://www.digikey.com/products/en?keywords=ADP1607ACPZN-R7CT-ND, Cost=3.40, Manufacturer Part Number=ADP1607ACPZN-R7, Vendor=Digikey, Vendor Description="IC REG BOOST ADJ 1A SYNC 6LFCSP"
U80: "Accelerometer Triple ±2/±4/±8/±16g 2V to 3.6V 14-Pin LGA T/R", Manufacturer="Analog Devices Inc.", Manufacturer Part Number=ADXL345BCCZ-RL, Vendor Part Number=ADXL345BCCZ-RLCT-ND, ComponentLink1Description=Datasheet, ComponentLink1URL=https://www.digikey.com/product-detail/en/analog-devices-inc/ADXL345BCCZ-RL/ADXL345BCCZ-RLCT-ND/2237841, Cost=4.95, Vendor=Digikey, Vendor Description="ACCEL 2-16G I2C/SPI 14LGA"
U85: library part DS1818_5, "3.3V EconoReset with Pushbutton", Manufacturer="Maxim Integrated", Manufacturer Part Number=DS1818R-5+T&R, Vendor Part Number=DS1818R-5+CT-ND, ComponentLink1Description=Datasheet, ComponentLink1URL=https://www.digikey.com/product-detail/en/maxim-integrated/DS1818R-5-T-R/DS1818R-5-CT-ND/1566808, Cost=2.62, Vendor=Digikey, Vendor Description="IC 3.06V W/PB 5% SOT23-3"
U90: "TPS22860 Ultra-low leakage load switch 6-SOT-23 -40 to 85", Manufacturer="Texas Instruments", Vendor Part Number=296-43982-1-ND, ComponentLink1Description=Datasheet, ComponentLink1URL=https://www.digikey.com/product-detail/en/texas-instruments/TPS22860DBVR/296-43982-1-ND/5973206, Cost=.84, Manufacturer Part Number=TPS22860DBVR, Vendor=Digikey, Vendor Description="IC SWITCH SPDT SOT23-6"
U91: "uBLOX MAX-M8Q GPS Breakout for Active", Manufacturer=Airspy, Manufacturer Part Number="UPU-uBLOX M8Q3A SMA", ComponentLink1Description=Datasheet, ComponentLink1URL=https://v3.airspy.us/product/upu-ublox-m8q3a-sma/, Cost=33.95, Vendor=Airspy, Vendor Description="uBLOX MAX-M8Q GPS Breakout for Active Antennas", Vendor Part Number="UPU-uBLOX M8Q3A SMA"
V50: "Varistor (Voltage-Sensitive Resistor)", Manufacturer="Littelfuse Inc.", Manufacturer Part Number=V5.5MLA0805NH, Vendor Part Number=F3814CT-ND, ComponentLink1Description=Datasheet, ComponentLink1URL=http://www.littelfuse.com/~/media/electronics/datasheets/varistors/littelfuse_varistor_mla_datasheet.pdf.pdf, Cost=0.53, Vendor=Digikey, Vendor Description="VARISTOR 8.2V 120A 0805"
XTAL30: "crystal", Manufacturer="CTS-Frequency Controls", Manufacturer Part Number=402F38411CAR, Vendor Part Number=CTX1354CT-ND, ComponentLink1Description=Datasheet, ComponentLink1URL=https://www.digikey.com/product-detail/en/cts-frequency-controls/402F38411CAR/CTX1354CT-ND/4972892, Cost=.88, Vendor=Digikey, Vendor Description="CRYSTAL 38.4000MHZ 10PF SMD"
Y1: library part XTAL, Manufacturer="ECS Inc.", Manufacturer Part Number=ECS-95.4-S-4, Vendor Part Number=X420-ND, ComponentLink1Description=Datasheet, ComponentLink1URL=https://www.digikey.com/product-detail/en/ecs-inc/ECS-95.4-S-4/X420-ND/79307, Cost=.69, Vendor=Digikey, Vendor Description="CRYSTAL 9.5450MHZ SERIES T/H"
Y2: library part Component_1, "Signal Conditioning 10.7MHZ 330 OHM CERA", Manufacturer="Murata Electronics", Manufacturer Part Number=SFECV10M7FA00-R0, Vendor Part Number=81-SFECV10M7FA00-R0, ComponentLink1Description=Datasheet, ComponentLink1URL=https://www.mouser.com/ProductDetail/Murata-Electronics/SFECV10M7FA00-R0?qs=sGAEpiMZZMtMMXztyU6kdIFTJJQM3M6Q8oelu8IKNP4%3d, Cost=.99, Vendor=Mouser, Vendor Description="Signal Conditioning 10.7MHZ 330 OHM CERA"
Z70 Z85: "Default Diode", Manufacturer=STMicroelectronics, Manufacturer Part Number=ESDA7P120-1U1M, Vendor Part Number=497-17159-1-ND, ComponentLink1Description=Datasheet, ComponentLink1URL=https://www.digikey.com/product-detail/en/stmicroelectronics/ESDA7P120-1U1M/497-17159-1-ND/6709859, Cost=.38, Vendor=Digikey, Vendor Description="TVS DIODE 5.5V 11.5V 1610"

## Via types
v1: diameter 24, hole 12, Top Layer to Bottom Layer, 200 vias

## Nets (pads, with @x,y where several pads share a name; then routed paths per layer and width w, separated by ;. In a path a pad name is that pad's centre, name@x,y a point inside that pad or via, vN(x,y) a via of type N, cw(c..) or ccw(c..) an arc to the next point about the centre after c; other vN are vias at no path point)
ACC_C\S\: TP17.1 U33.33 U80.7 | length 1298.1
  Top Layer w8: 2061.07,1606 2061.07,1271.95 U33.33@2061.79,1271.24
  Top Layer w10: 2061.07,1606 2410,1954.93 TP17.1@2410,2065 2410,2319.66 2435.47,2345.13 U80.7@2504.34,2345.13
ACC_INT1: TP18.1 U33.32 U80.8 | length 1215.8
  Top Layer w8: U33.32@2081.47,1271.24 2081.47,1595 ; U80.8@2508.18,2301.93 U80.8@2513.02,2297.09
  Top Layer w10: 2081.47,1595 2510,2023.53 TP18.1@2510,2065 2508.18,2066.82 U80.8@2508.18,2301.93
ACC_INT2: TP19.1 U33.31 U80.9 | length 1295.6
  Top Layer w8: U33.31@2101.16,1271.24 2101.16,1587.13 2327.03,1813 2358,1813 TP19.1@2610,2065 ; U80.9@2539.67,2301.93 U80.9@2544.51,2297.09
  Top Layer w10: U80.9@2539.67,2301.93 2539.67,2245.33 2610,2175 TP19.1@2610,2065
ACC_SCL: R46.1 TP16.1 U33.29 U80.14 | length 1703.3
  Top Layer w8: U33.29@2140.53,1271.24 2140.53,1577 ; U80.14@2669.5,2345.13 2782.87,2345.13 2810.34,2317.66 2810.34,2303 ; TP16.1@2810,2065 2810.34,2303 ; R46.1@2886.9,2345.16 2851.74,2310 2822.34,2310 2810.34,2298 2810.34,2303
  Top Layer w10: 2140.53,1577 2142.87,1577 2343.87,1778 2523.17,1778 2810,2064.83 TP16.1@2810,2065 ; R46.1@2872.9,2359.16 R46.1@2886.9,2345.16
ACC_SDA: R45.1 TP15.1 U33.30 U80.13 | length 1419.1
  Top Layer w8: U33.30@2120.84,1271.24 2120.84,1581
  Top Layer w10: 2120.84,1581 2122.53,1582.69 2122.53,1584.46 2334.07,1796 2441,1796 TP15.1@2710,2065 2710,2227 2724.16,2241.16 2726.42,2241.16 ; U80.13@2665.66,2301.93 2726.42,2241.16 ; R45.1@2774.9,2241.16 2726.42,2241.16
DBG_SWCLK: J95.2 U33.1 | length 1090.3
  Top Layer w10: J95.2@1393,168.72 1402.72,168.72 1557,323 1557,540.54 1908.54,892.09 1908.54,906.57 U33.1@2002.73,1000.76
DBG_SWDIO: J95.3 U33.2 | length 1051.3
  Top Layer w10: J95.3@1493,168.72 1575,250.72 1575,524.98 2020.85,970.83 2020.85,999.2 U33.2@2022.42,1000.76
DBG_SWO: J95.4 U33.3 | length 1018.1
  Top Layer w10: J95.4@1593,168.72 1593,496.13 2042.1,945.24 U33.3@2042.1,1000.76